# Altium PCB Copy of PCB1.PcbDoc
Units mil, origin at the board's own origin, x right, y up, seen from the top; angles counter-clockwise.
Board outline 6000 x 4000 mil, 2 copper layers (Top Layer, Bottom Layer); 12 components, 7 nets, 29 pads, 0 vias.
Unrouted connection lines stored in the file: 6.
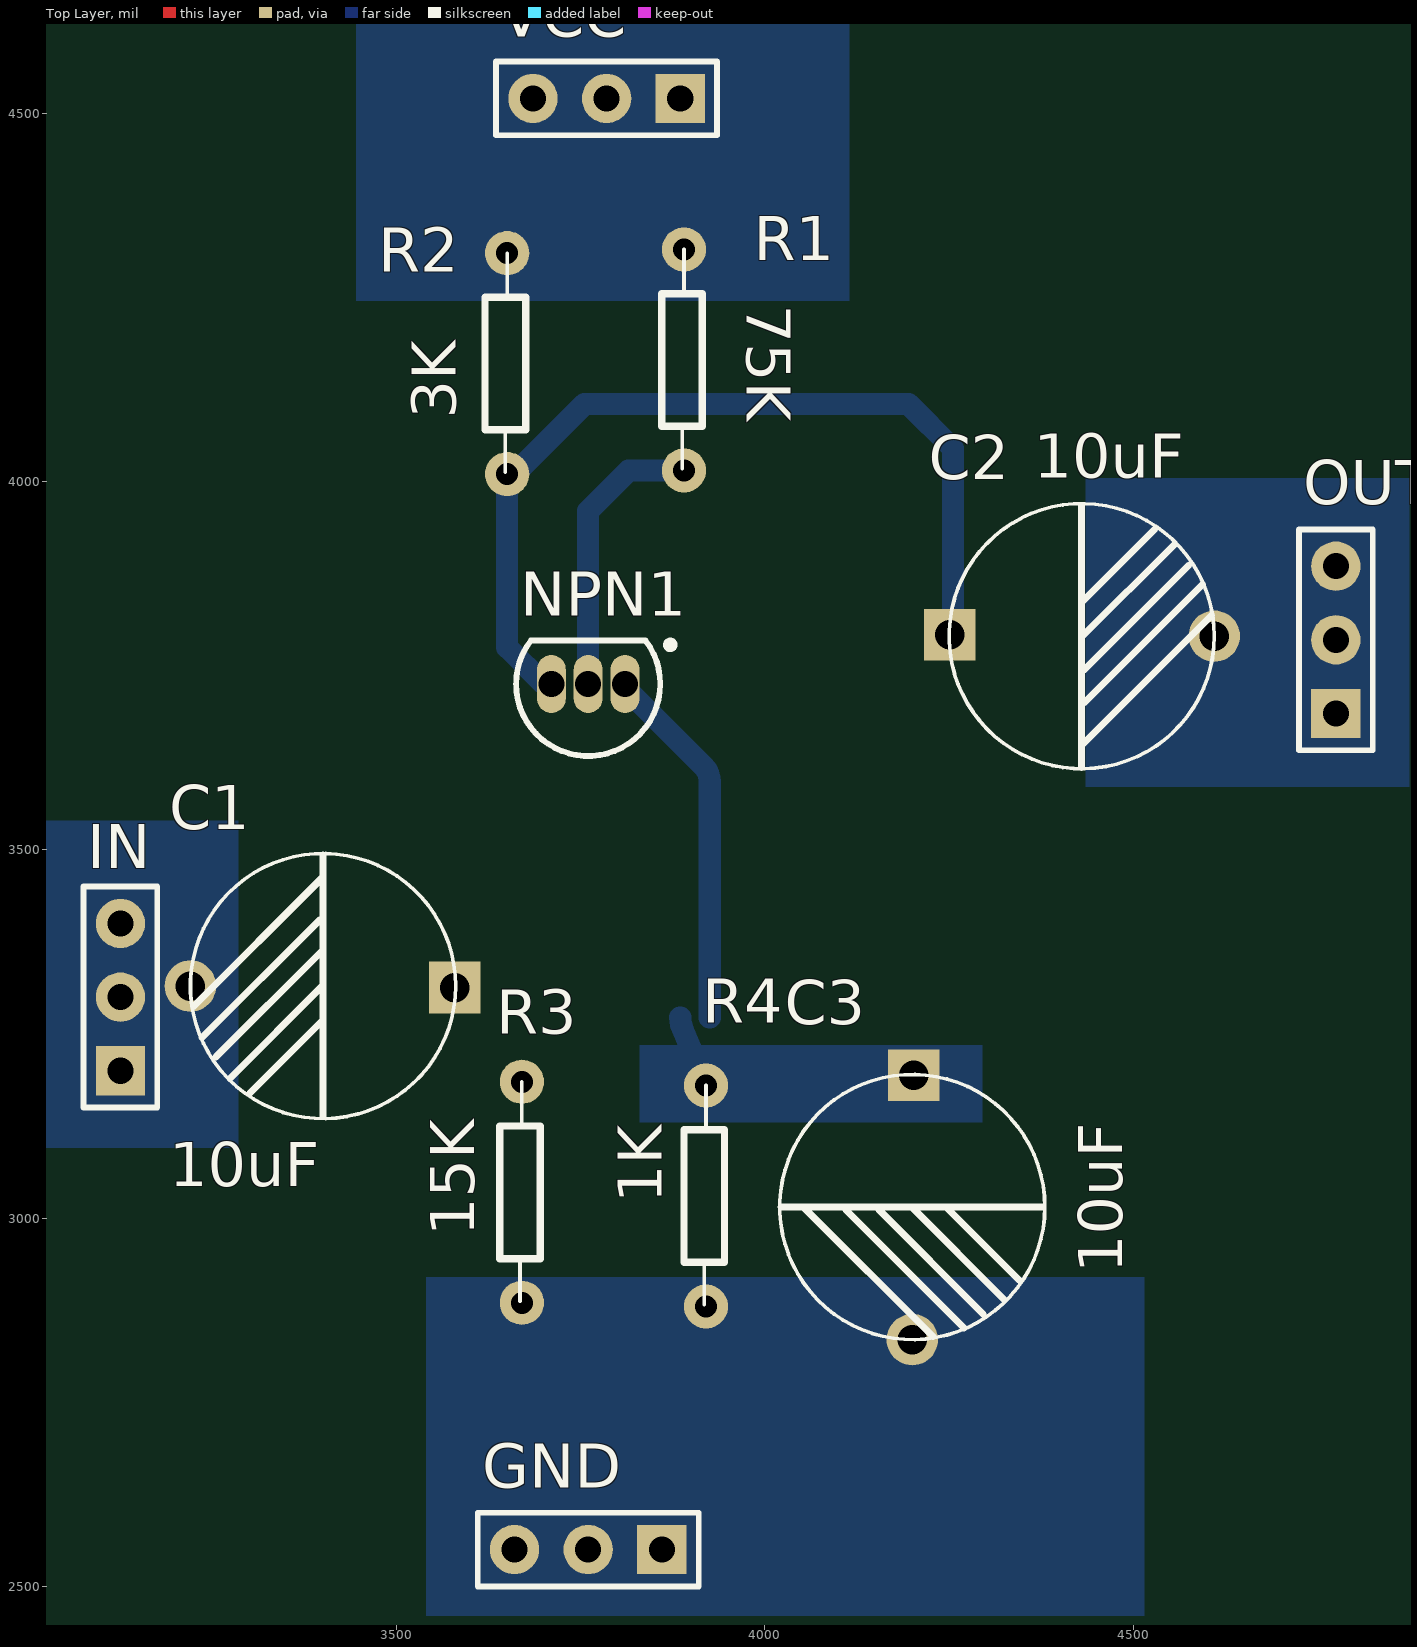
[diagram p0: Top Layer view]
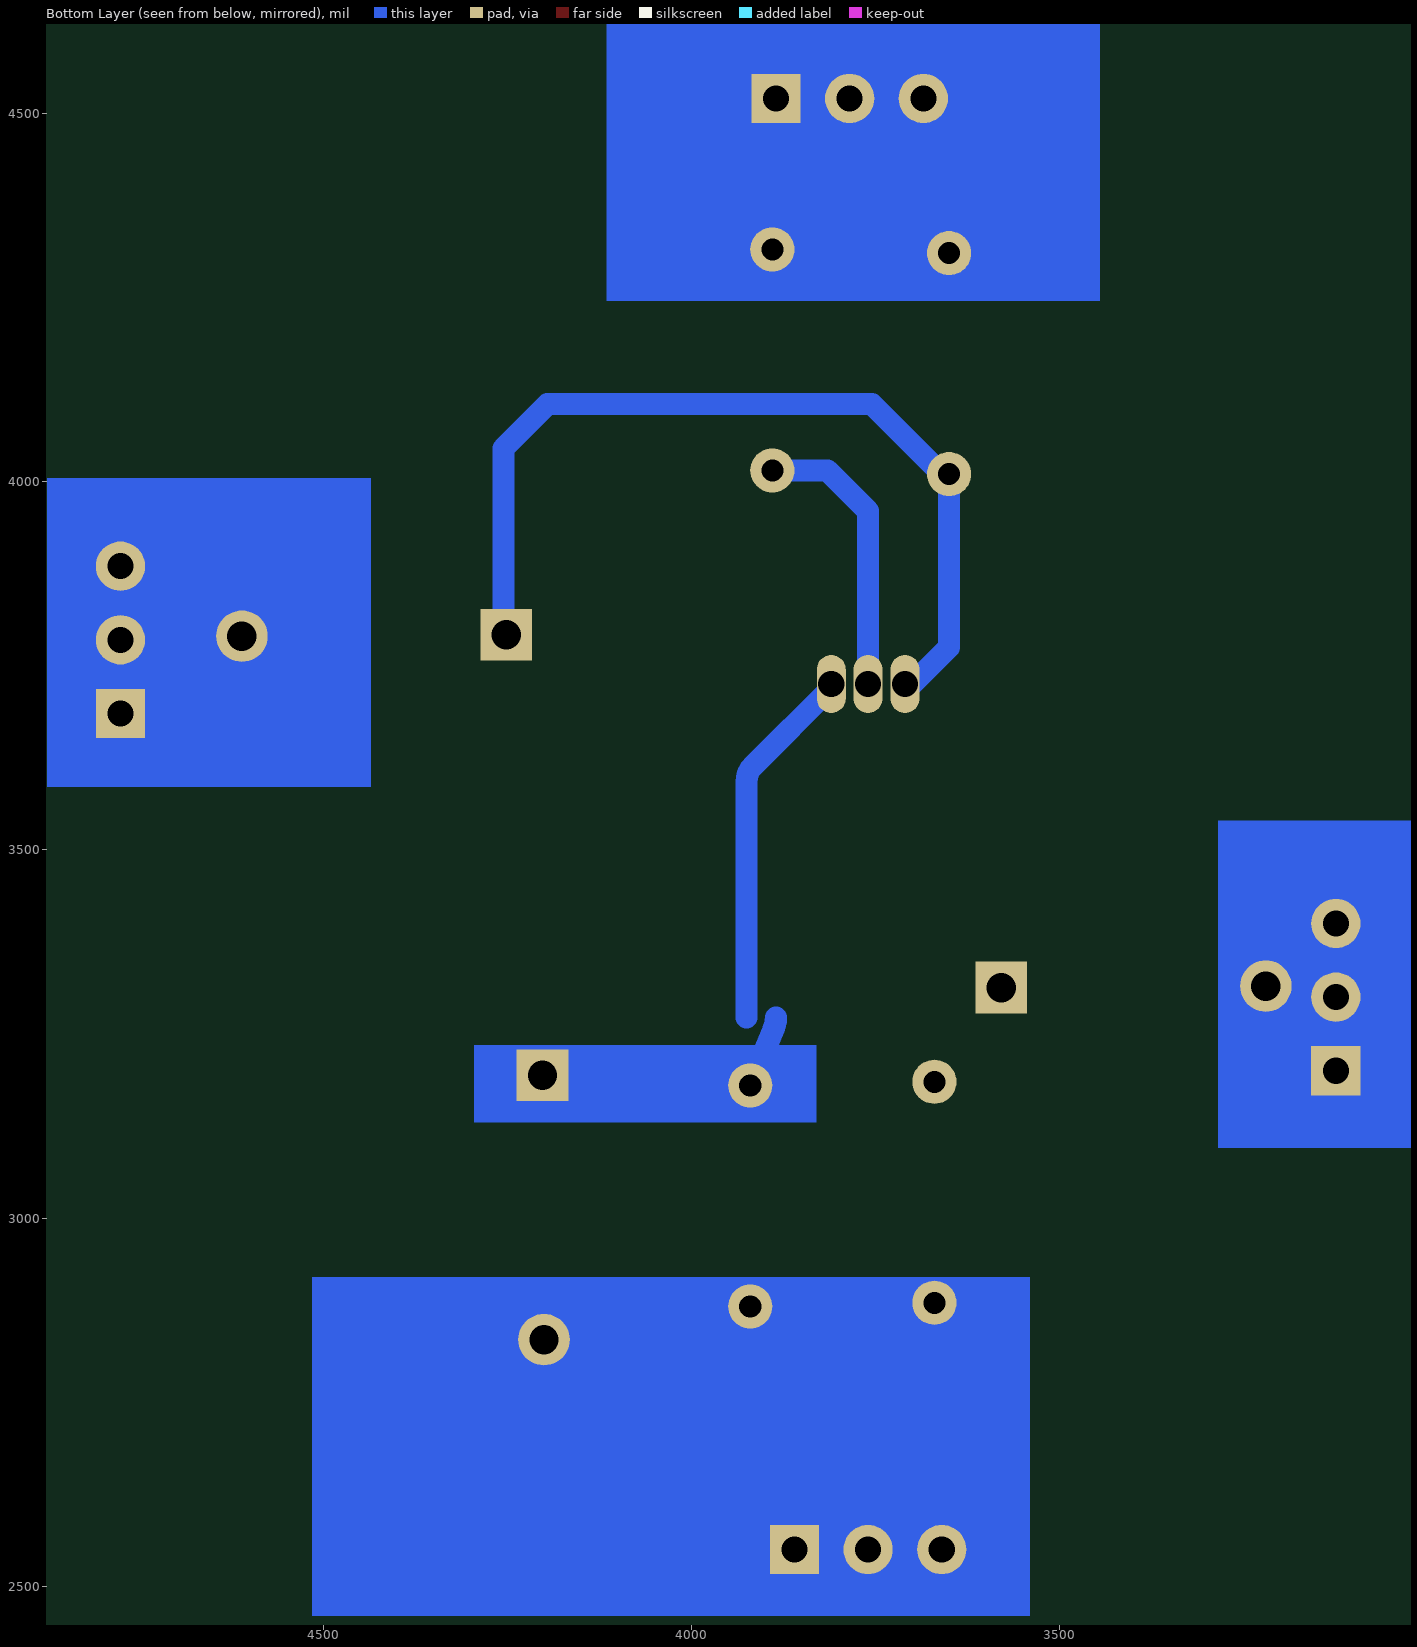
[diagram p1: Bottom Layer view, seen from below]

## Layer stack, top to bottom
Top Solder: solder mask 0.4, Solder Resist, Dk 3.5
Top Layer: signal copper 1.4
Dielectric 1: dielectric 12.6, FR-4, Dk 4.8
Bottom Layer: signal copper 1.4
Bottom Solder: solder mask 0.4, Solder Resist, Dk 3.5

## Board outline
1000,1000 7000,1000 7000,5000 1000,5000

## Design rules (kind name [scope] priority, off if disabled: settings)
Clearance [All] p1: gap=10 ignorepadtopadclearanceinfootprint=FALSE except(0: Arc-Hole Track-Hole SMDPad-Hole THPad-Hole Via-Hole Fill-Hole Poly-Hole Region-Hole Text-Hole)
PolygonConnect [All] p1: connectstyle=Relief reliefconductorwidth=10 reliefentries=4 polygonreliefangle="90 Angle" airgapwidth=10
RoutingVias [All] p1: holewidth=28 width=50 viastyle="Through Hole" minholewidth=28 minwidth=50 maxholewidth=28 maxwidth=50
SolderMaskExpansion [All] p1: expansion=4 istentingtop=FALSE
Width [All] p1: maxlimit=10 minlimit=10 preferedwidth=10
30 further rules are at their usual default settings.

## Components (designator, comment, footprint, x,y, rotation, side; value= is the part's Value field where it differs from the comment)
C1 "10uF" CAP-470UF 3400,3315 r180 top value=10pF
C2 "10uF" CAP-470UF 4430,3790 r0 top value=10pF
C3 "10uF" CAP-470UF 4200,3015.01 r270 top value=10pF
GND "CON3" SIP3 3760,2550 r180 top
IN "CON3" SIP3 3125,3300 r90 top
NPN1 "2N3904" TO-92A 3760,3725 r90 top (schematic designator V1)
OUT "CON3" SIP3 4775,3785 r90 top
R1 "75K" RES-1/2W-1 3890,4015 r90 top
R2 "3K" RES-1/2W-1 3650,4010 r90 top
R3 "15K" RES-1/2W-1 3670,2885 r90 top value=1K
R4 "1K" RES-1/2W-1 3920,2880 r90 top
VCC "CON3" SIP3 3785,4520 r180 top

## Footprints (in the part's own frame and the unit in brackets; to place one, negate y for a bottom-side part, rotate by r counter-clockwise, add the part's x,y. Pads: shape width x height; smd on the part's side, far side on the other; paste and mask are expansions set on the pad)
CAP-470UF [mil]
  rect 70x70 hole 40: 1(-179,2)
  round 70 hole 40: 2(180.01,0)
  silkscreen extent -180,-180 180,180, body extent -157,-164 158,150, height 454
RES-1/2W-1 [mil]
  round 60 hole 30: 1(0,0) 2(300,0)
  silkscreen extent 2,-25 300,30, body extent -37,-46 335,45, height 91
SIP3 [mm]
  rect 1.7x1.7 hole 0.9: 1(-2.54,0)
  round 1.7 hole 0.9: 2(0,0) 3(2.54,0)
  silkscreen extent -3.81,-1.27 3.81,1.27, body extent -3.81,-1.27 3.81,1.27, height 8.5
TO-92A [mm] "TO, Flat Index; 3 In-Line, Axial Leads; Body Dia. 4.5mm; Leads 0.51 x 0.48 mm (max)"
  oval 2x1 hole 0.9: 1(0,-1.27) 2(0,0) 3(0,1.27)
  silkscreen extent -2.48,-2.96 1.5,2.48, body extent -2.48,-2.5 1.5,2.5, height 6.86

## Part data
C1 C2 C3: library part Cap, "Capacitor", LatestRevisionDate=17-Jul-2002, LatestRevisionNote="Re-released for DXP Platform.", PackageDescription="Radial Cap, Thru-Hole; 2 Leads; 0.3 in Pin Spacing", PackageReference=RAD-0.3, Published=8-Jun-2000, Publisher="Altium Limited"
NPN1: "NPN General Purpose Amplifier", ComponentLink1Description="Manufacturer Link", ComponentLink1URL=http://www.fairchildsemi.com/, ComponentLink2Description=Datasheet, ComponentLink2URL=http://www.fairchildsemi.com/ds/2N%2F2N3904.pdf, DatasheetVersion=1997, LatestRevisionDate=15-Jan-2003, LatestRevisionNote="PCB Footprint 'BCY-W3/D4.7' replaced", PackageDescription="TO, Flat Index; 3 In-Line, Axial Leads; Body Dia. 4.5mm; Leads 0.51 x 0.48 mm (max)", PackageReference=TO-92A, PackageVersion=Sep-1998, Published=8-Jun-2000, Publisher="Altium Limited"
R1 R2 R3 R4: library part Res2, "Resistor", LatestRevisionDate=17-Jul-2002, LatestRevisionNote="Re-released for DXP Platform.", PackageDescription="Axial Device, Thru-Hole; 2 Leads; 0.4 in Pin Spacing", PackageReference=AXIAL-0.4, Published=8-Jun-2000, Publisher="Altium Limited"

## Nets (pads, with @x,y where several pads share a name; then routed paths per layer and width w, separated by ;. In a path a pad name is that pad's centre, name@x,y a point inside that pad or via, vN(x,y) a via of type N, cw(c..) or ccw(c..) an arc to the next point about the centre after c; other vN are vias at no path point)
GND: C3.2 GND.1 GND.2 GND.3 R3.1 R4.1
"Net C1_1": C1.1 NPN1.2 R1.1 R3.2
"Net C1_2": C1.2 IN.1 IN.2 IN.3
NetC2_1: C2.1 NPN1.3 R2.1
NetC3_1: C3.1 NPN1.1 R4.2 | length 115.1
  Bottom Layer w30: 3885,3272.5 ccw(c3925,3272.5) 3888.04,3257.2 R4.2 R4.2@3925,3165
NetOUT_1: OUT.1 OUT.2 OUT.3
VCC: R1.2 R2.2 VCC.1 VCC.2 VCC.3
pads on no net: C2.2
copper on no net: | length 2110.5
  Bottom Layer w30: 3700,3725 3650,3775 3650,4010 3660,4010 3755,4105 4195,4105 4255,4045 4255,3796 ; 3760,3725 3760,3960 3815,4015 3890,4015 ; 3810,3725 3810,3720 3916.21,3613.79 cw(c3895,3592.57) 3925,3592.57 3925,3272.5

## Other copper
Bottom Layer:
  rectangle net NetOUT_1: 4435,3585 4875,4005
  rectangle net NetC3_1: 3830,3130 4295,3235
  rectangle net GND: 3540,2460 4515,2920
  rectangle net "Net C1_2": 2955,3095 3285,3540
  rectangle net VCC: 3445,4245 4115,4670